# Altium PCB PCB1.PcbDoc
Units mil, origin at the board's own origin, x right, y up, seen from the top; angles counter-clockwise.
Board outline 820 x 2400 mil, 2 copper layers (Top Layer, Bottom Layer); 20 components, 23 nets, 94 pads, 27 vias.
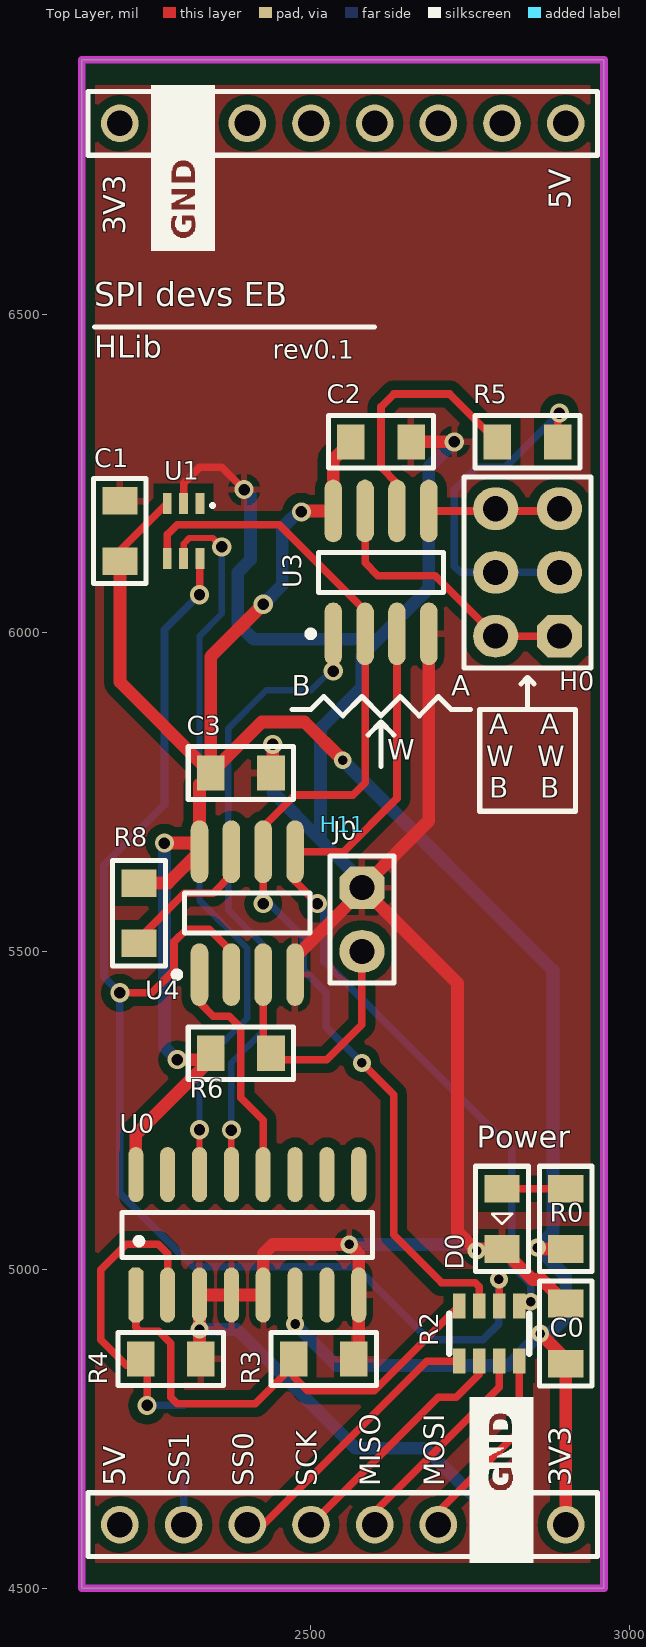
[diagram p0: Top Layer view]
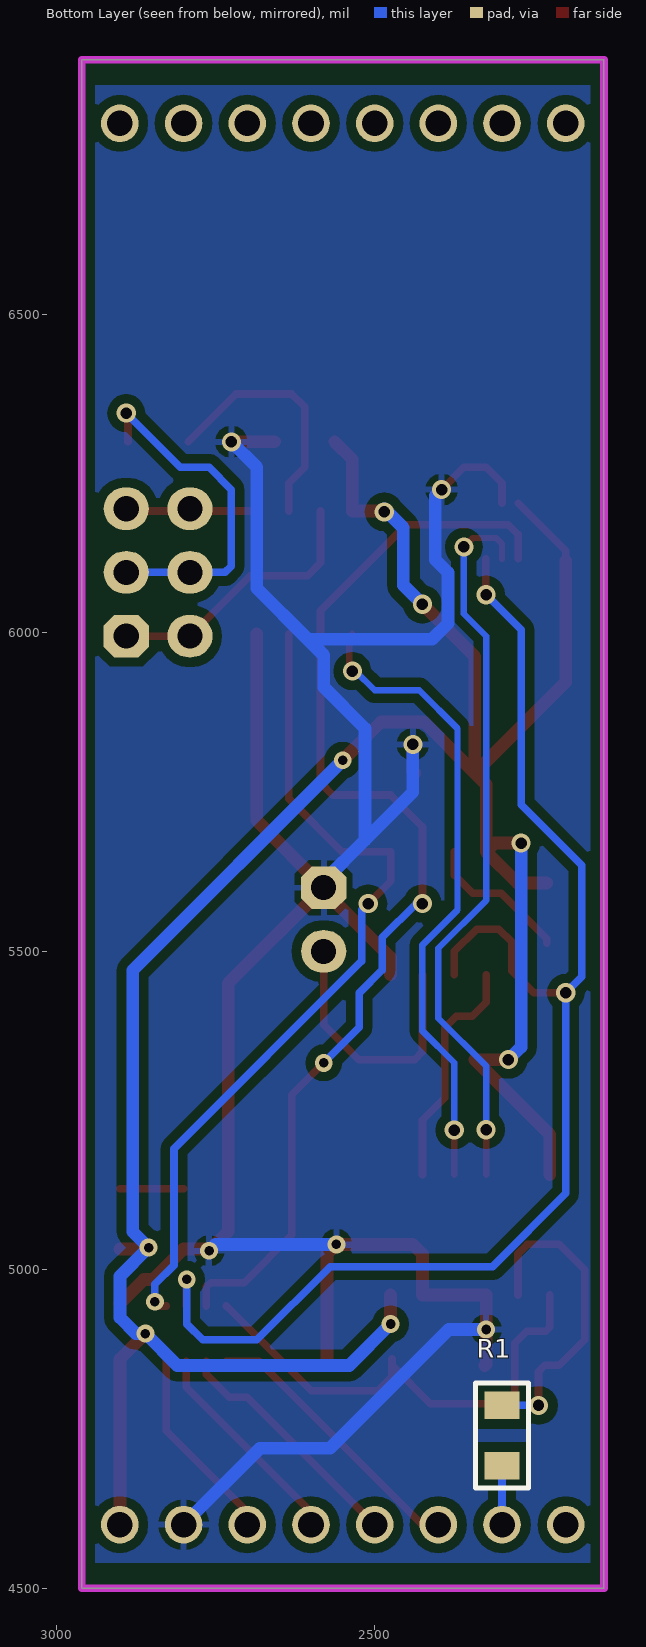
[diagram p1: Bottom Layer view, seen from below]
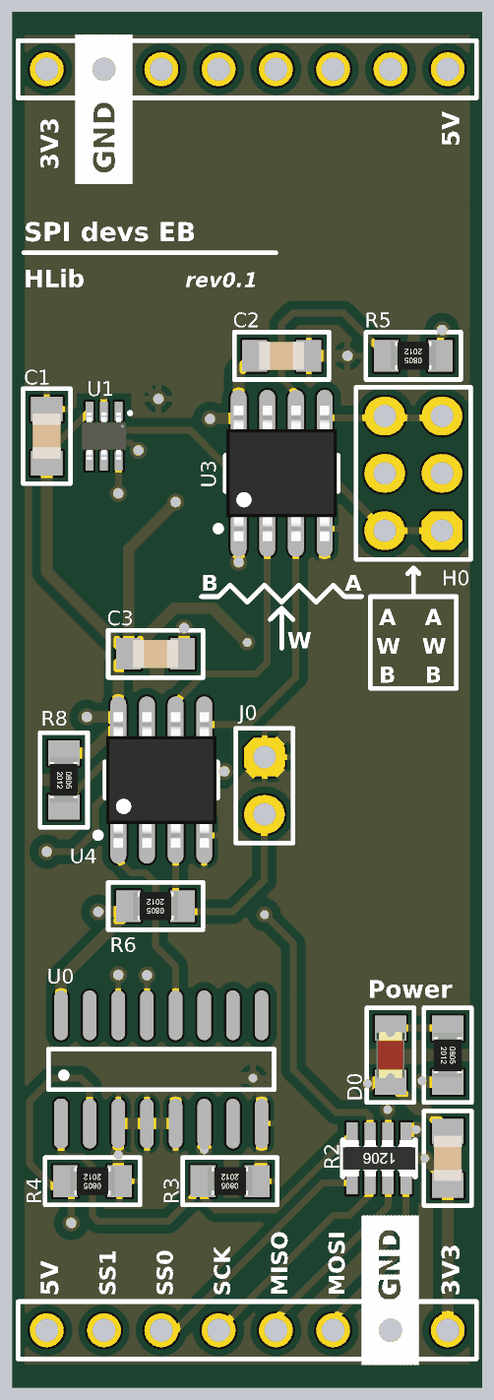
[diagram p2: 3D render of the assembled board from above, using the file's embedded part models]

## Layer stack, top to bottom
Top Solder: solder mask 0.4, Solder Resist, Dk 3.5
Top Layer: signal copper 1.4
Dielectric1: dielectric 12.6, FR-4, Dk 4.8
Bottom Layer: signal copper 1.4
Bottom Solder: solder mask 0.4, Solder Resist, Dk 3.5

## Board outline
2140,4500 2140,6900 2960,6900 2960,4500

## Design rules (kind name [scope] priority, off if disabled: settings)
Clearance [InPolygon] p1: gap=15
Clearance Clearance_1 [All] p2: gap=10
PolygonConnect [All] p1: connectstyle=Relief reliefconductorwidth=10 reliefentries=4 polygonreliefangle="90 Angle" airgapwidth=10
RoutingVias [All] p1: holewidth=25 width=40 viastyle="Through Hole" minholewidth=28 minwidth=50 maxholewidth=28 maxwidth=50
SolderMaskExpansion [All] p1: expansion=4
Width [All] p1: maxlimit=25 minlimit=8 preferedwidth=10
30 further rules are at their usual default settings.

## Components (designator, comment, footprint, x,y, rotation, side; value= is the part's Value field where it differs from the comment)
C0 "C_Ceramic" SM_0805_C_CERAMIC 2900,4900 r270 top
C1 "C_Ceramic" SM_0805_C_CERAMIC 2200,6160 r270 top
C2 "C_Ceramic" SM_0805_C_CERAMIC 2610,6300 r180 top
C3 "C_Ceramic" SM_0805_C_CERAMIC 2390,5780 r0 top
D0 "LED" SM_0805_LED 2800,5080 r270 top
H0 "HD_3x2" HD_male_3x2_100mil_straight 2840,6095 r90 top
H11 "MBoard1_BH_DualPorts" MBoard1_BH_DualPorts 2200,6800 r0 top
J0 "Jumper 2" HD_MALE_2_100mil_straight 2580,5600 r270 top
R0 "R" SM_0805_R 2900,5080 r270 top
R1 "R" SM_0805_R 2300,4740 r270 bottom
R2 "220" RA4 2780,4900 r180 top
R3 "R" SM_0805_R 2520,4860 r180 top
R4 "R" SM_0805_R 2280,4860 r180 top
R5 "" SM_0805_R 2840,6300 r180 top
R6 "" SM_0805_R 2390,5340 r180 top
R8 "" SM_0805_R 2230,5560 r270 top
U0 "74138" SO-16 2180,4900 r90 top
U1 "TMP121" SC70-6 2300,6160 r180 top
U3 "MCP41XXX" SO-8 2610,6095 r90 top
U4 "SST25VF016B" SO-8 2400,5560 r90 top

## Footprints (in the part's own frame and the unit in brackets; to place one, negate y for a bottom-side part, rotate by r counter-clockwise, add the part's x,y. Pads: shape width x height; smd on the part's side, far side on the other; paste and mask are expansions set on the pad)
HD_MALE_2_100mil_straight [mm]
  oct 1.7x1.8 hole 1: 1(0,0)
  oval 1.7x1.8 hole 1: 2(2.54,0)
  silkscreen extent -1.27,-1.27 3.81,1.27, body extent -1.27,-1.27 3.81,1.27, height 8
HD_male_3x2_100mil_straight [mm]
  oct 1.7x1.8 hole 1: 1(-2.54,-1.27)
  oval 1.7x1.8 hole 1: 2(-2.54,1.27) 3(0,-1.27) 4(0,1.27) 5(2.54,-1.27) 6(2.54,1.27)
  Mechanical 15 keep-out lines w0.1: -3.81,2.54 3.81,2.54 3.81,-2.54 -3.81,-2.54 -3.81,2.54
  silkscreen extent -3.81,-2.54 3.81,2.54, body extent -3.81,-2.54 3.81,2.54, height 8
MBoard1_BH_DualPorts [mm]
  round 1.5 hole 1.02: 1(0,0) 2(2.54,0) 3(5.08,0) 4(7.62,0) 5(10.16,0) 6(12.7,0) 7(15.24,0) 8(17.78,0) 9(17.78,-55.88) 10(15.24,-55.88) 11(12.7,-55.88) 12(10.16,-55.88) 13(7.62,-55.88) 14(5.08,-55.88) 15(2.54,-55.88) 16(0,-55.88)
  silkscreen extent -1.27,-57.15 19.05,1.27, body extent -1.27,-57.15 19.05,1.27, height 8
RA4 [mm] "Resistor Array (0603x4) form TME"
  rect 0.5x1 smd: 1(-1.2,-1.1) 2(-1.2,1.1) 3(-0.4,-1.1) 4(-0.4,1.1) 5(0.4,-1.1) 6(0.4,1.1) 7(1.2,-1.1) 8(1.2,1.1)
  silkscreen extent -1.6,-0.8 1.6,0.8, body extent -1.6,-0.8 1.6,0.8, height 0.5
SC70-6 [mm]
  rect 0.35x0.85 smd: 1(-0.65,-1.1) 2(0,-1.1) 3(0.65,-1.1) 4(0.65,1.1) 5(0,1.1) 6(-0.65,1.1)
  silkscreen extent -1.16,-1.03 -1.14,-1.01, body extent -1,-1.05 1,1.05, height 0.92
SM_0805_C_CERAMIC [mm] "General Surface-mount cap, low density"
  rect 1.1x1.4 smd: 1(-1.2,0) 2(1.2,0)
  silkscreen extent -2.1,-1.05 2.1,1.05, body extent -1,-0.62 1,0.63, height 0.58
SM_0805_LED [mm] "General polarized surface-mount Led, low density"
  rect 1.1x1.4 smd: 1(-1.2,0) 2(1.2,0)
  silkscreen extent -2.1,-1.05 2.1,1.05, body extent -1.01,-0.62 1.01,0.63, height 1.1
SM_0805_R [mm] "General Surface-mount resistor, low density"
  rect 1.1x1.4 smd: 1(-1.2,0) 2(1.2,0)
  silkscreen extent -2.1,-1.05 2.1,1.05, body extent -1,-0.63 1,0.62, height 0.45
SO-8 [mm]
  oval 2.5x0.7 smd: 1(-2.45,1.905) 2(-2.45,0.635) 3(-2.45,-0.635) 4(-2.45,-1.905) 5(2.45,-1.905) 6(2.45,-0.635) 7(2.45,0.635) 8(2.45,1.905)
  silkscreen extent -2.57,-2.5 0.8,2.93, body extent -3,-2.45 3,2.45, height 1.75
SO-16 [mm]
  oct 2.2x0.6 smd: 1(1.537,-1.143)
  oval 2.2x0.6 smd: 2(1.537,-2.413) 3(1.537,-3.683) 4(1.537,-4.953) 5(1.537,-6.223) 6(1.537,-7.493) 7(1.537,-8.763) 8(1.537,-10.033) 9(6.337,-10.033) 10(6.337,-8.763) 11(6.337,-7.493) 12(6.337,-6.223) 13(6.337,-4.953) 14(6.337,-3.683) 15(6.337,-2.413) 16(6.337,-1.143)
  silkscreen extent 3.04,-10.59 4.84,-0.59, body extent 1.99,-10.54 5.89,-0.64, height 1.75

## Part data
C0 C1 C2 C3: "Non-polarity ceramic capacitor"
H0: "Header, 3-pins/row, double row,"
J0: library part "JP 2"
R0 R1 R3 R4: "Resistor"
R2: library part RA4
R5 R6 R8: library part R, "Resistor"
U0: "3 -to- 8 Decoder - Out Low"

## Via types
v1: diameter 30, hole 18, Top Layer to Bottom Layer, tented both sides, 17 vias
v2: diameter 28, hole 15, Top Layer to Bottom Layer, tented both sides, 10 vias

## Nets (pads, with @x,y where several pads share a name; then routed paths per layer and width w, separated by ;. In a path a pad name is that pad's centre, name@x,y a point inside that pad or via, vN(x,y) a via of type N, cw(c..) or ccw(c..) an arc to the next point about the centre after c; other vN are vias at no path point)
3V3: C0.2 C1.2 C2.2 C3.1 H11.9 R0.2 R6.2 R8.1 U0.6 U0.16 U1.3 U3.8 U4.8 | length 4297
  Top Layer w12: C1.2 2200,6128.9 U1.3
  Top Layer w20: C1.2 2200,5922.76 C3.1 ; U0.16 2225,5212.24 2342.76,5330 v1(2290,5330) ; R8.1 2275.79,5607.24 U4.8 ; v1(2270,5670) 2311.46,5670 U4.8 ; v1(2425,6045) 2342.76,5962.76 C3.1 ; v2(2475,4915) U0.6 ; v1(2485,6190) 2486.46,6191.46 U3.8 2535,6272.24 C2.2 ; v2(2550,5800) 2490,5860 2422.76,5860 C3.1 ; v2(2855,5035) 2857.24,5032.76 R0.2 ; v2(2860,4900) 2900,4860 C0.2 H11.9 ; U4.8 2325,5762.24 C3.1
  Bottom Layer w20: v1(2270,5670) 2270,5350 v1(2290,5330) ; v1(2425,6045) 2455,6075 2455,6165 2485,6195 v1(2485,6190) ; v2(2475,4915) 2540,4850 2810,4850 v2(2860,4900) 2875,4900 2900,4925 2900,4990 v2(2855,5035) 2880,5060 2880,5470 v2(2550,5800)
ALL_OFF: U0.15
DPOT_NCS: U0.13 U3.1 | length 1031.7
  Top Layer w10: U0.13 v1(2375,5219.38) v1@2375,5220 ; v1(2535,5940) 2530,5940 2540,5950 2540,5990 2526.46,5990 U3.1
  Bottom Layer w10: v1(2375,5219.38) 2375,5325 2425,5375 2425,5510 2370,5565 2370,5850 2430,5910 2500,5910 2530,5940 v1(2535,5940)
FLASH_NCS: U0.12 U4.1 | length 370.1
  Top Layer w12: U4.1 2325,5420 2346.67,5398.33 2371.67,5398.33 2390,5380 2390,5270 2425,5235 U0.12
GND: C0.1 C1.1 C2.1 C3.2 D0.2 H11.10 J0.1 R3.1 R4.1 U0.3 U0.4 U0.5 U0.8 U1.2 U3.4 U4.4 | length 4568
  Top Layer w12: U1.2 2300,6235 2325,6260 2360,6260 v1(2395,6225)
  Top Layer w20: R4.1@2327.24,4850 2325,4852.24 v2(2325,4906.38) U0.3 U0.4 U0.5 2425,5025 2440,5040 v2(2560,5040) 2575,5025 U0.8 R3.1@2575,4857.76 ; C3.2 2440,5782.76 v1(2440,5825) ; U4.4 2475,5490.5 2580,5595.5 J0.1 ; C2.1 v1(2725,6300) ; U3.4 2685,5705 J0.1 ; C0.1 2862.24,4985 2847.76,4985 D0.2 2762.76,5032.76 v2(2760,5030) 2730,5060 2730,5450 J0.1
  Bottom Layer w20: v2(2325,4906.38) 2383.62,4906.38 2570,4720 2680,4720 H11.10 ; v1(2395,6225) 2405,6215 2405,6115 2385,6095 2385,6015 2410,5990 2605,5990 ; v1(2440,5825) 2440,5750 2515,5675 ; v2(2560,5040) 2750,5040 v2(2760,5030) ; J0.1 2580,5610 2515,5675 ; v1(2725,6300) 2685,6260 2685,6070 2605,5990 ; 2515,5675 2515,5850 2580,5915 2580,5965 2605,5990
MISO: R2.3 U1.6 U4.2 | length 2167.9
  Top Layer w12: v1(2200,5435) 2250,5435 2285,5470 2285,5515 2305,5535 2340,5535 2375,5500 U4.2 ; v1@2325.59,6060.59 U1.6 ; v2(2795,4985) 2795.75,4984.25 R2.3
  Bottom Layer w12: v1@2320,6055 2270,6005 2270,5730 2175,5635 2175,5460 v1(2200,5435) 2200,5120 2315,5005 2570,5005 2685,4890 2770,4890 2795,4915 v2(2795,4985)
  other v1: 2325,6060
MOSI: R2.1 U3.3 U4.5 | length 1333.4
  Top Layer w12: v1(2510,5575) 2475,5610 U4.5 2551.46,5656.46 2635,5740 U3.3 ; R2.1 2838.31,4943.31 v2(2845,4950)
  Bottom Layer w12: v1(2510,5575) 2520,5565 2520,5485 2815,5190 2815,5007.43 2845,4977.43 v2(2845,4950)
NetD0_1: D0.1 R0.1 | length 100
  Top Layer w12: D0.1 R0.1
NetH11_11: H11.11 R2.2 | length 309.4
  Top Layer w12: H11.11 2700,4620 2827.24,4747.24 R2.2
NetH11_12: H11.12 R2.4 | length 337.8
  Top Layer w12: H11.12 2600,4620 2795.75,4815.75 R2.4
NetH11_13: H11.13 R2.6 | length 382.7
  Top Layer w12: H11.13 2700,4800 2728.22,4800 2764.25,4836.03 R2.6
NetH11_14: H11.14 R2.8 | length 439.1
  Top Layer w12: H11.14 2425,4600 2681.69,4856.69 R2.8
NetH11_15: H11.15 R1.2 | length 92.8
  Bottom Layer w12: H11.15 R1.2
NetJ0_2: J0.2 R6.1 U4.3 | length 419.2
  Top Layer w12: U4.3 2425,5342.24 2437.24,5330 2525,5330 2580,5385 J0.2
NetR5_2: R5.2 U3.6 | length 396
  Top Layer w12: U3.6 2635,6235 2610,6260 2610,6355 2630,6375 2717.76,6375 R5.2
NetR8_2: R8.2 U4.7 | length 230.1
  Top Layer w12: R8.2 2230,5520 2301.24,5591.24 2346.24,5591.24 2375,5620 U4.7
P_A: H0.5 H0.6 U3.5 | length 206.5
  Top Layer w12: U3.5 2886.46,6191.46 H0.5
P_B: H0.1 H0.2 U3.7 | length 434.1
  Top Layer w12: U3.7 2585,6110 2605,6090 2695,6090 H0.2 H0.1
P_W: H0.3 H0.4 R5.1 | length 550
  Top Layer w12: R5.1 2887.24,6342.24 v1(2890,6345)
  Bottom Layer w12: H0.3 H0.4 2735,6095 2725,6105 2725,6225 2760,6260 2805,6260 v1(2890,6345)
SCK: R2.5 U1.4 U3.2 U4.6 | length 1799.1
  Top Layer w12: U1.4 2274.41,6154.41 2290,6170 2450,6170 2585,6035 U3.2 2585,5765 2565.46,5745.46 2474.54,5745.46 2425,5695.92 U4.6 v1(2425,5575) ; v2(2580,5325) 2630,5275 2630,5055 2705,4980 2757.59,4980 2764.25,4973.34 R2.5
  Bottom Layer w12: v1(2425,5575) 2435,5575 2488,5522 2488,5470.89 2524.25,5434.64 2524.25,5380.75 v2(2580,5325)
SS0: R2.7 R3.2 U0.1 | length 774.6
  Top Layer w12: U0.1 2225,4910 2231.44,4903.56 2261.04,4903.56 2280,4884.6 2280,4800 2290,4790 2412.76,4790 R3.2@2472.76,4850 ; R3.2 R3.2@2472.76,4850 ; R2.7 2599.45,4810 2495,4810 2472.76,4832.24 R3.2@2472.76,4850
SS1: R1.1 R4.2 U0.2 | length 505.7
  Top Layer w12: v1(2242.76,4787.24) 2242.76,4840 2232.76,4850 2210,4850 2170,4890 2170,5000 2210,5040 2260,5040 2275,5025 U0.2
  Bottom Layer w12: v1(2242.76,4787.24) R1.1
TMP_NCS: U0.14 U1.5 | length 1155
  Top Layer w10: U1.5 2300,6140 2309,6149 2346,6149 v1(2360,6135) ; U0.14 v1(2325,5220)
  Bottom Layer w10: v1(2325,5220) 2325,5320 2400,5395 2400,5505 2325,5580 2325,5995 2360,6030 v1(2360,6135)
pads on no net: H11.1 H11.2 H11.3 H11.4 H11.5 H11.6 H11.7 H11.8 H11.16 U0.7 U0.9 U0.10 U0.11 U1.1

## Polygon pours and split planes (outlines as drawn)
GND on Top Layer "Top" (solid, remove dead copper, pour order 2): 2140,6860 2960,6860 2960,4540 2140,4540
GND on Bottom Layer "Bot" (solid, remove dead copper, pour order 2): 2140,6860 2960,6860 2960,4540 2140,4540

## Keep-outs
Keep-Out Layer:
  the board outline again, w12

## Silkscreen, mask and mechanical layers (free items; w line width, h text height)
Top Overlay:
  drawing of 627 lines, arcs and shapes, not listed
  text "5V" at 2920,6665 h60 r90
  text "3V3" at 2220,6625 h60 r90
  text "SPI devs EB" at 2160,6500 h65
  text "HLib" at 2160,6420 h60
  text "rev0.1" at 2440,6420 h50
  text "B" at 2470,5890 h55
  text "A" at 2720,5890 h55
  text "A" at 2780,5830 h55
  text "A" at 2860,5830 h55
  text "W" at 2620,5790 h55
  text "W" at 2775,5780 h55
  text "W" at 2855,5780 h55
  text "B" at 2780,5730 h55
  text "B" at 2860,5730 h55
  text "Power" at 2760,5180 h60
  text "5V" at 2220,4660 h60 r90
  text "SS1" at 2320,4660 h55 r90
  text "SS0" at 2420,4660 h55 r90
  text "SCK" at 2520,4660 h55 r90
  text "MISO" at 2620,4660 h55 r90
  text "MOSI" at 2720,4660 h55 r90
  text "3V3" at 2920,4660 h60 r90
Drill Drawing:
  text ".LEGEND" at 7200,3200 h60
  text "Drill Drawing." at 7200,3100 h60

## Dimensions
2140,4500 to 2140,6900 on Mechanical 1
2140,4500 to 2960,4500 on Mechanical 1